# Altium PCB DCCDecoder.PcbDoc
Units mil, origin at the board's own origin, x right, y up, seen from the top; angles counter-clockwise.
Board outline 6000 x 4000 mil, 2 copper layers (Top Layer, Bottom Layer); 24 components, 21 nets, 86 pads, 0 vias.
Unrouted connection lines stored in the file: 40.
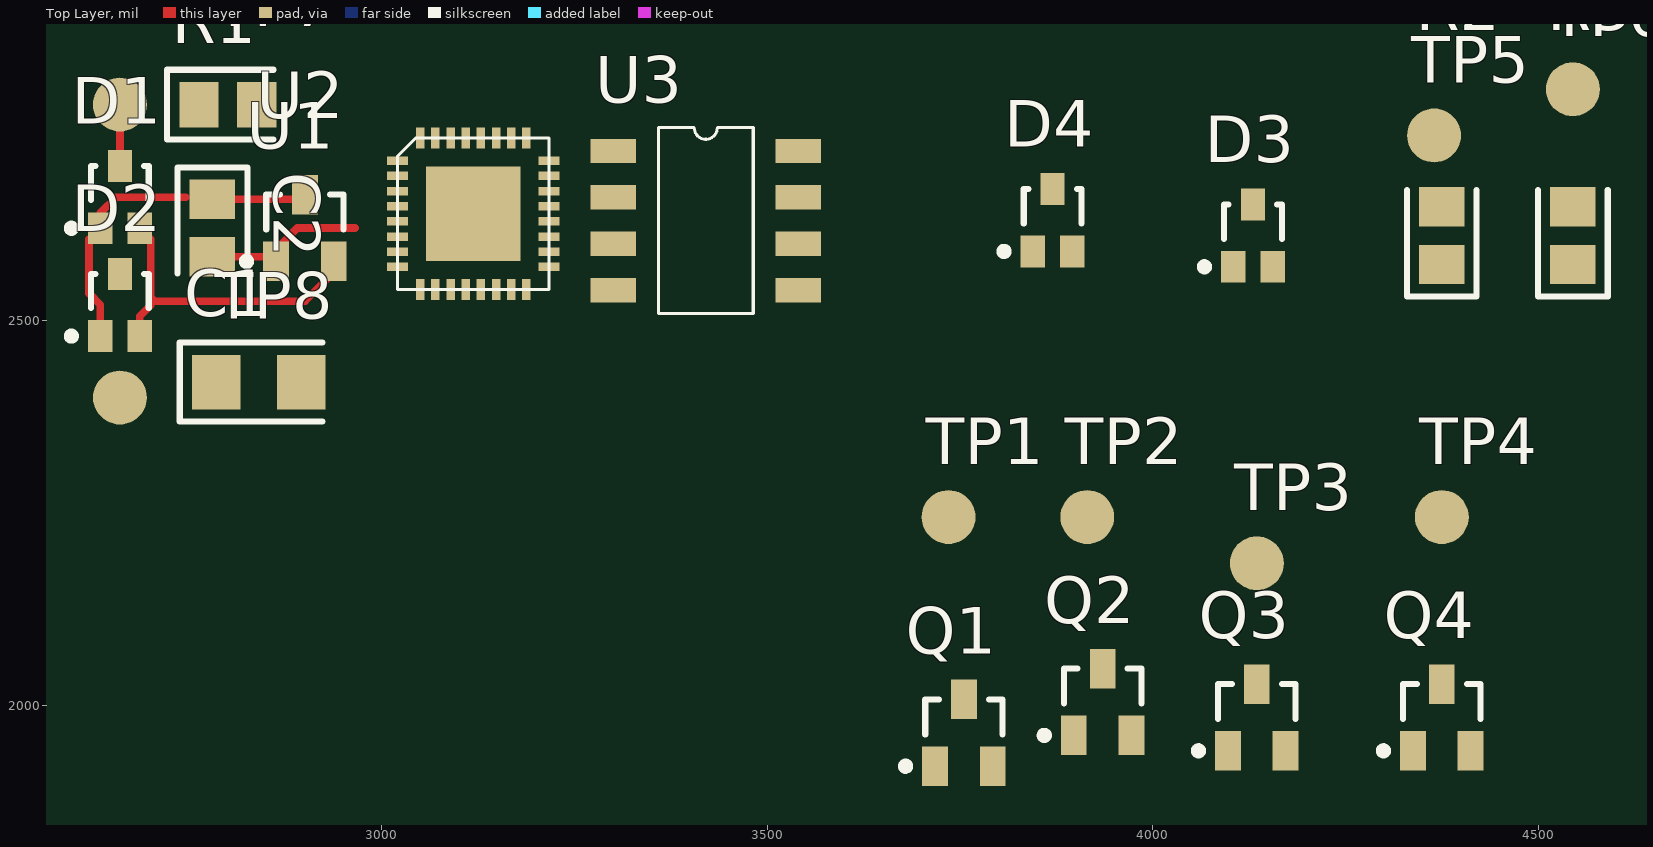
[diagram p0: Top Layer view]
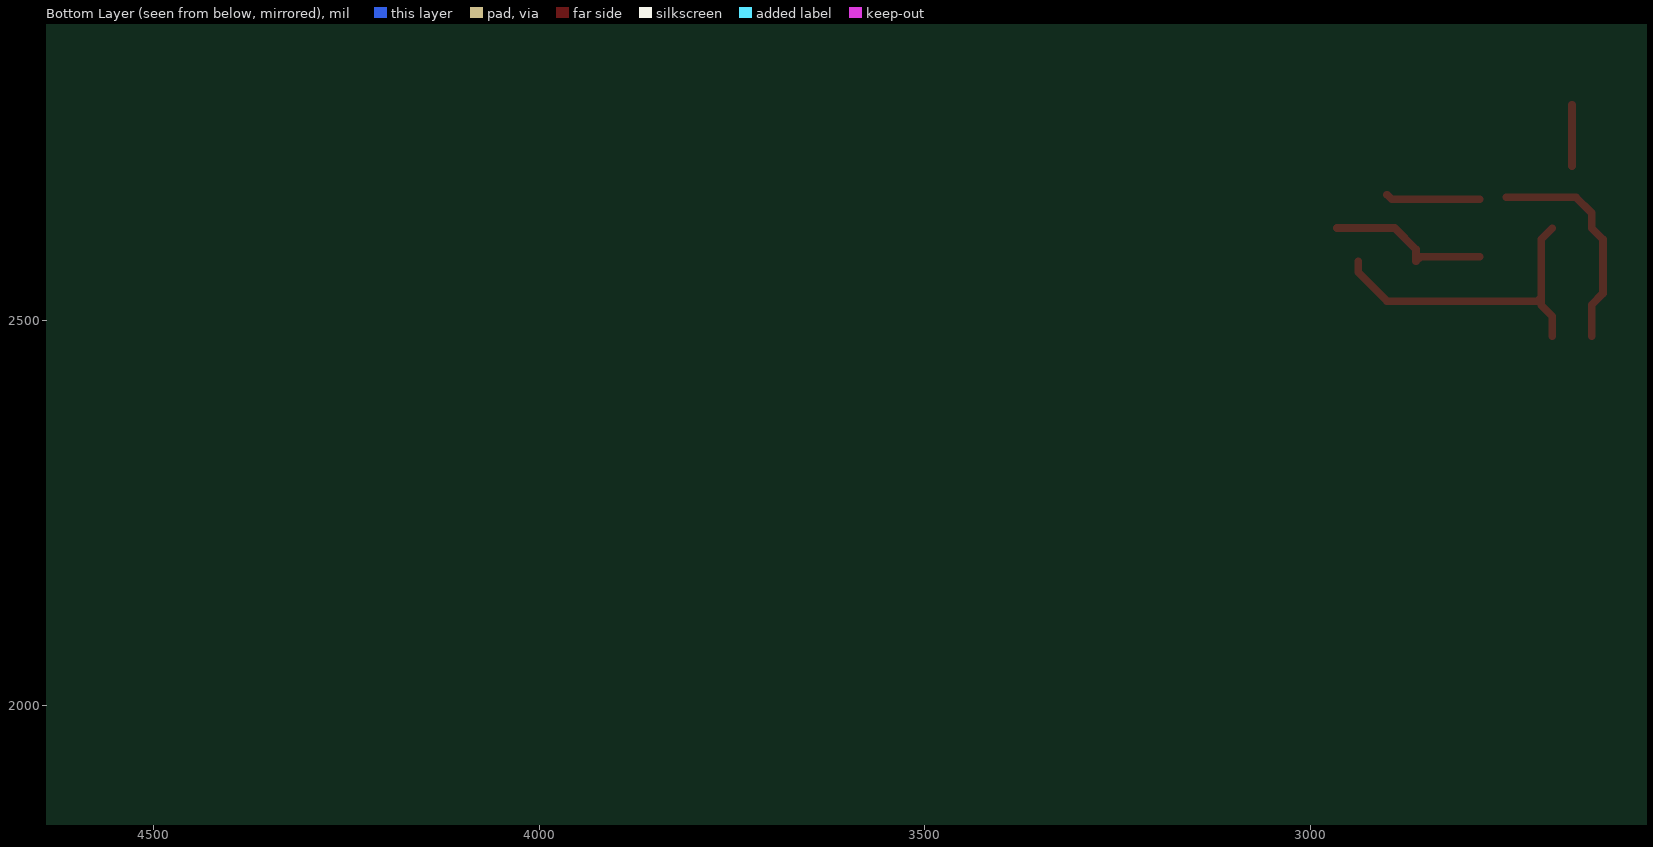
[diagram p1: Bottom Layer view, seen from below]

## Layer stack, top to bottom
Top Layer: signal copper 1.4
Dielectric: dielectric 12.6, FR-4, Dk 4.8
Bottom Layer: signal copper 1.4

## Board outline
1000,1000 7000,1000 7000,5000 1000,5000

## Design rules (kind name [scope] priority, off if disabled: settings)
Clearance [All] p1: gap=10
ComponentClearance [All] p1: gap=10 collisioncheckmode=0
PolygonConnect [All] p1: connectstyle=Relief reliefconductorwidth=10 reliefentries=4 polygonreliefangle="90 Angle"
RoutingLayers [All] p1: top layer=Horizontal bottom layer=Vertical
RoutingVias [All] p1: holewidth=28 width=50 viastyle="Through Hole" minholewidth=28 minwidth=50 maxholewidth=28 maxwidth=50
SolderMaskExpansion [All] p1: expansion=4
TestPointUsage [All] p1: valid=0 allowmultiple=FALSE
Testpoint [All] p1: side=15 testpointundercomponent=TRUE minsize=40 maxsize=100 preferedsize=60 minholesize=0 maxholesize=40 preferedholesize=32 testpointgrid=1 style=1023 order=-539222988
Width [All] p1: maxlimit=10 minlimit=10 preferedwidth=10
16 further rules are at their usual default settings.

## Components (designator, comment, footprint, x,y, rotation, side; value= is the part's Value field where it differs from the comment)
C1 "Cap Pol1" CC3216-1206 2840,2420 r0 top
C2 "Cap" CC2012-0805 2780,2620 r270 top
D1 "BAV99W" SOT-323 2660,2660 r0 top
D2 "BAV99W" SOT-323 2660,2520 r0 top
D3 "BAV99W" SOT-323 4130,2610 r0 top
D4 "BAV99W" SOT-323 3870,2630 r0 top
Q1 "UN2212" SO-G3 3755,1965 r0 top
Q2 "UN2212" SO-G3 3935,2005 r0 top
Q3 "UN2212" SO-G3 4135,1985 r0 top
Q4 "UN2212" SO-G3 4375,1985 r0 top
R1 "Res2" CC2012-0805 2800,2780 r0 top
R2 "Res2" CC2012-0805 4375,2610 r90 top
R3 "Res2" CC2012-0805 4545,2610 r90 top
TP1 "Test Point" TestPoint 3735,2245 r0 top
TP2 "Test Point" TestPoint 3915,2245 r90 top
TP3 "Test Point" TestPoint 4135,2185 r90 top
TP4 "Test Point" TestPoint 4375,2245 r90 top
TP5 "Test Point" TestPoint 4365,2740 r90 top
TP6 "Test Point" TestPoint 4545,2800 r90 top
TP7 "Test Point" TestPoint 2660,2780 r0 top
TP8 "Test Point" TestPoint 2660,2400 r0 top
U1 "LM3480" SO-G3 2900,2620 r0 top
U2 "ATMEGA8(32)" 32M1-A 3020,2540 r0 top
U3 "ZHB6718" SOT223-8 3300,2720 r0 top

## Footprints (in the part's own frame and the unit in brackets; to place one, negate y for a bottom-side part, rotate by r counter-clockwise, add the part's x,y. Pads: shape width x height; smd on the part's side, far side on the other; paste and mask are expansions set on the pad)
32M1-A [mm]
  rect 3.1x3.1 smd: 0(2.5,2.5)
  rect 0.69x0.28 smd: 1(0,4.25) 2(0,3.75) 3(0,3.25) 4(0,2.75) 5(0,2.25) 6(0,1.75) 7(0,1.25) 8(0,0.75) 17(5,0.75) 18(5,1.25) 19(5,1.75) 20(5,2.25) 21(5,2.75) 22(5,3.25) 23(5,3.75) 24(5,4.25)
  rect 0.28x0.69 smd: 9(0.75,0) 10(1.25,0) 11(1.75,0) 12(2.25,0) 13(2.75,0) 14(3.25,0) 15(3.75,0) 16(4.25,0) 25(4.25,5) 26(3.75,5) 27(3.25,5) 28(2.75,5) 29(2.25,5) 30(1.75,5) 31(1.25,5) 32(0.75,5)
  silkscreen extent 0,0 5,5
CC2012-0805 [mm]
  rect 1.3x1.5 smd: 1(-0.95,0) 2(0.95,0)
  silkscreen extent -2,-1.15 1.5,1.15
CC3216-1206 [mm]
  rect 1.6x1.8 smd: 1(-1.4,0) 2(1.4,0)
  silkscreen extent -2.6,-1.3 2.1,1.3
SO-G3 [mm]
  rect 0.85x1.3 smd: 1(-0.95,-1.1) 2(0.95,-1.1) 3(0,1.1)
  silkscreen extent -2.05,-1.22 1.28,1.1
SOT223-8 [mm]
  rect 1.5x0.8 smd: 1(0,0) 2(0,-1.53) 3(0,-3.06) 4(0,-4.59) 5(6.1,-4.59) 6(6.1,-3.06) 7(6.1,-1.53) 8(6.1,0)
  silkscreen extent 1.48,-5.35 4.62,0.76
SOT-323 [mm] "SOT-323/SC-70; 3 Leads; Body 2.2 x 2.2 mm, inc. leads (LxW max)"
  rect 0.8x1.05 smd: 1(-0.65,-1.025) 2(0.65,-1.025) 3(0,1.025)
  silkscreen extent -1.72,-1.15 0.95,1.03
TestPoint [mil]
  round 70 smd: 1(0,0)

## Part data
C1: "Polarized Capacitor (Radial)"
C2: "Capacitor"
D1 D2 D3 D4: "Silicon Switching Diode Array for High-Speed Switching"
Q1 Q2 Q3 Q4: "Bias Resistor Transistor"
R1 R2 R3: "Resistor"
TP1 TP2 TP3 TP4 TP5 TP6 TP7 TP8: library part TestPoint
U1: library part LM7805CT, "Series 3-Terminal Positive Regulator"
U2: "8-Bit AVR Microcontroller"

## Nets (pads, with @x,y where several pads share a name; then routed paths per layer and width w, separated by ;. In a path a pad name is that pad's centre, name@x,y a point inside that pad or via, vN(x,y) a via of type N, cw(c..) or ccw(c..) an arc to the next point about the centre after c; other vN are vias at no path point)
GND: C1.2 C2.1 D1.1 D2.1 D3.1 D4.1 Q1.2 Q2.2 Q3.2 Q4.2 U1.3 U2.3 U2.5 U3.2 | length 413.3
  Top Layer w10: D2.1 2634.41,2520.59 2620,2535 2620,2605.24 D1.1 2634.41,2639.41 2655,2660 2745,2660 ; C2.1 2894.09,2657.4 U1.3
NetD1_3: D1.3 R1.1 TP7.1 | length 79.6
  Top Layer w10: D1.3 TP7.1
NetD2_3: D2.3 TP8.1
NetD3_3: D3.3 R2.1 TP5.1 U3.5
NetD4_3: D4.3 R3.2 TP6.1 U3.7
NetQ1_1: Q1.1 U2.9
NetQ1_3: Q1.3 TP1.1
NetQ2_1: Q2.1 U2.10
NetQ2_3: Q2.3 TP2.1
NetQ3_1: Q3.1 U2.11
NetQ3_3: Q3.3 TP3.1
NetQ4_1: Q4.1 U2.12
NetQ4_3: Q4.3 TP4.1
NetR1_2: R1.2 U2.32
NetR2_2: R2.2 R3.1 U2.19
NetU2_13: U2.13 U3.4
NetU2_14: U2.14 U3.3
NetU2_15: U2.15 U3.1
NetU2_16: U2.16 U3.8
VCC: C2.2 U1.1 U2.4 U2.6 | length 214.7
  Top Layer w10: C2.2 2856.69,2582.6 U1.1 2862.6,2592.6 2890,2620 2965,2620
VDD: C1.1 D1.2 D2.2 D3.2 D4.2 U1.2 U3.6 | length 421.2
  Top Layer w10: D2.2 2685.59,2505.59 2700,2520 2700,2605.24 D1.2 ; 2700,2530 2705,2525 2900,2525 2937.4,2562.4 U1.2
pads on no net: U2.0 U2.1 U2.2 U2.7 U2.8 U2.17 U2.18 U2.20 U2.21 U2.22 U2.23 U2.24 U2.25 U2.26 U2.27 U2.28 U2.29 U2.30 U2.31